# Altium PCB Button Board.PcbDoc
Units mm, origin at the board's own origin, x right, y up, seen from the top; angles counter-clockwise.
Board outline 32.6 x 18 mm, 2 copper layers (Top Layer, Bottom Layer), stack 0.772 mm thick; 10 components, 11 nets, 58 pads, 16 vias.
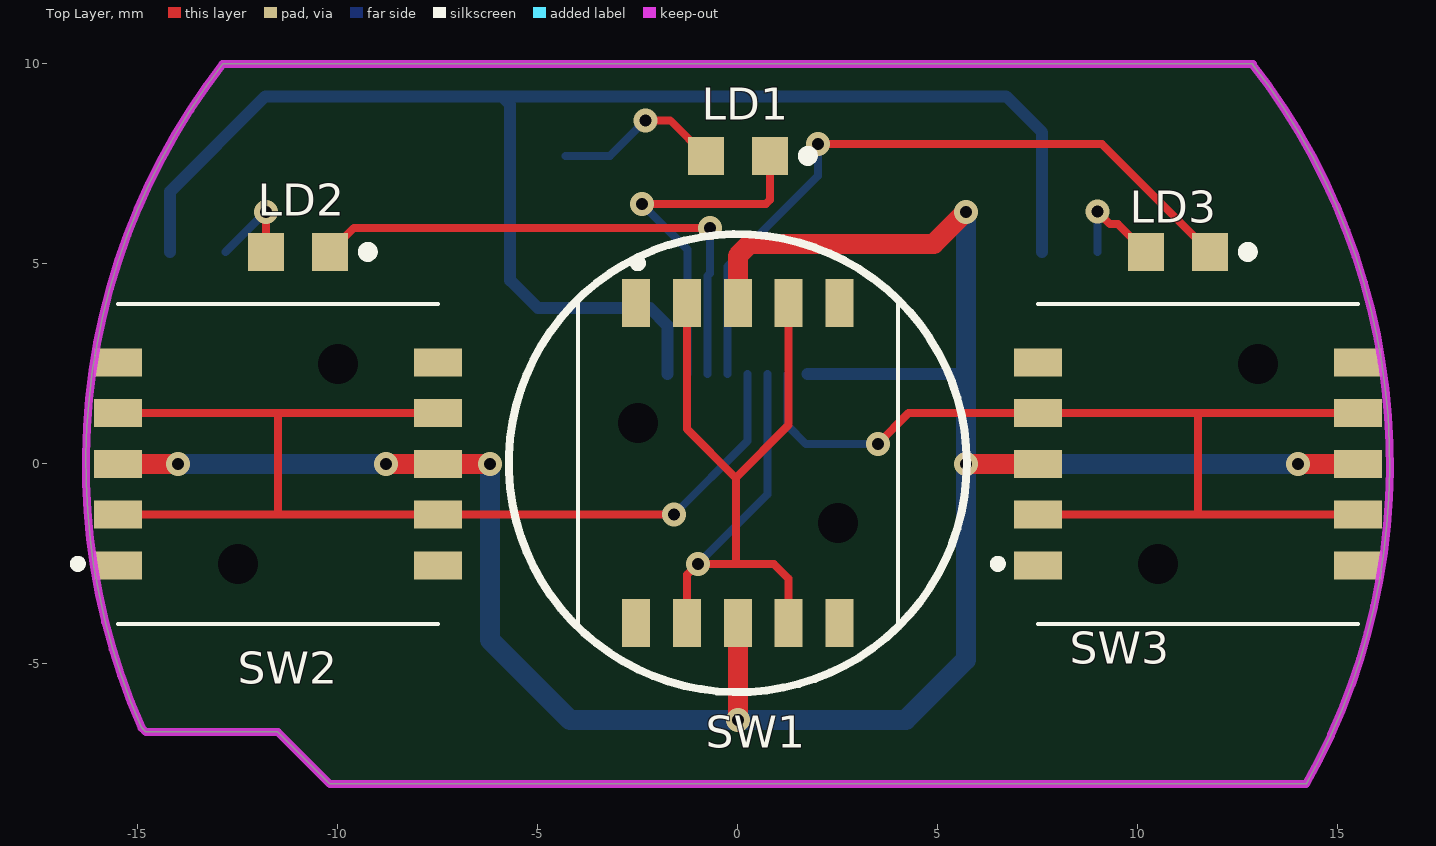
[diagram p0: Top Layer view]
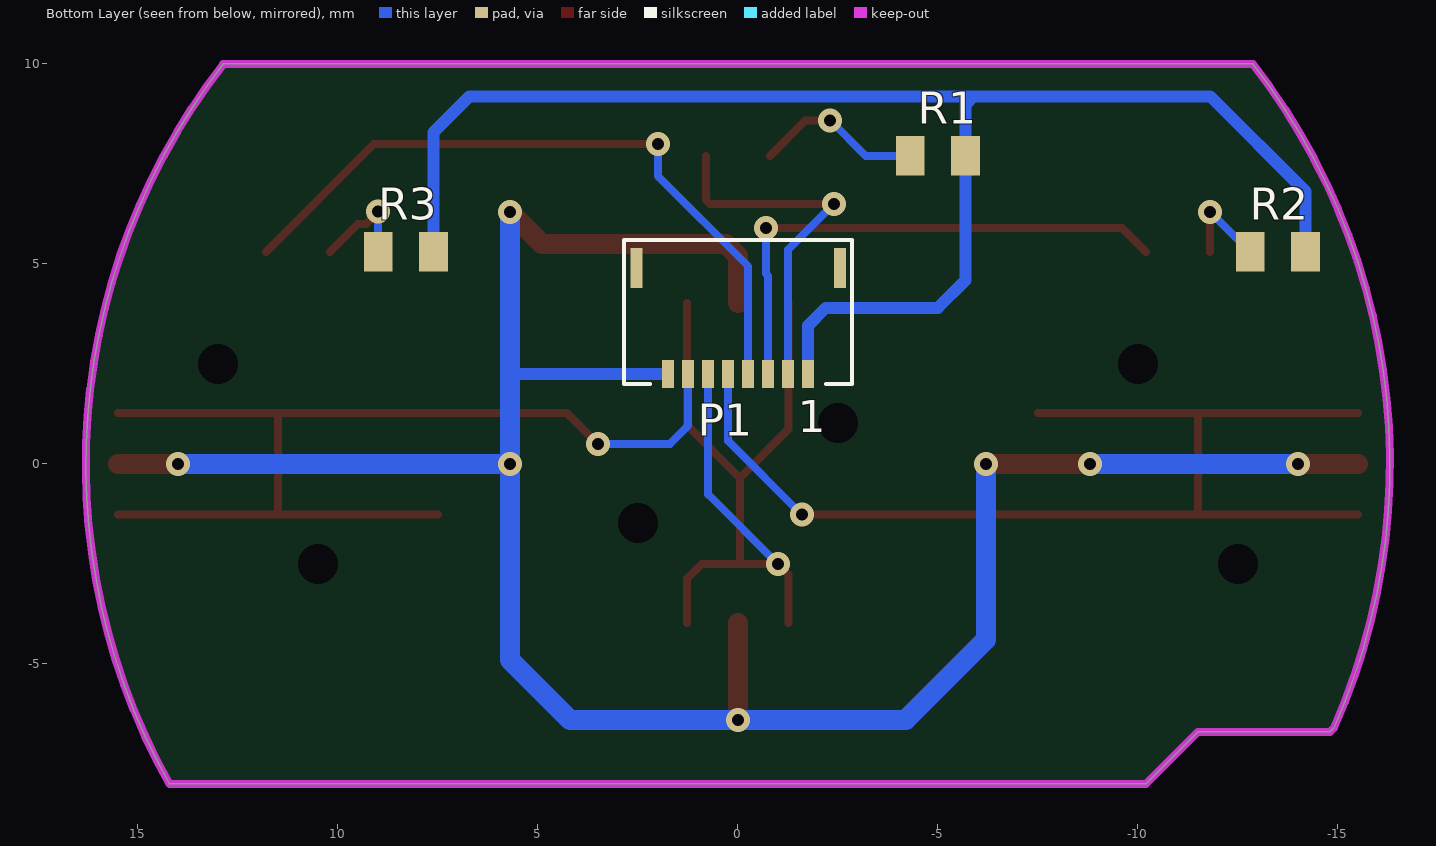
[diagram p1: Bottom Layer view, seen from below]
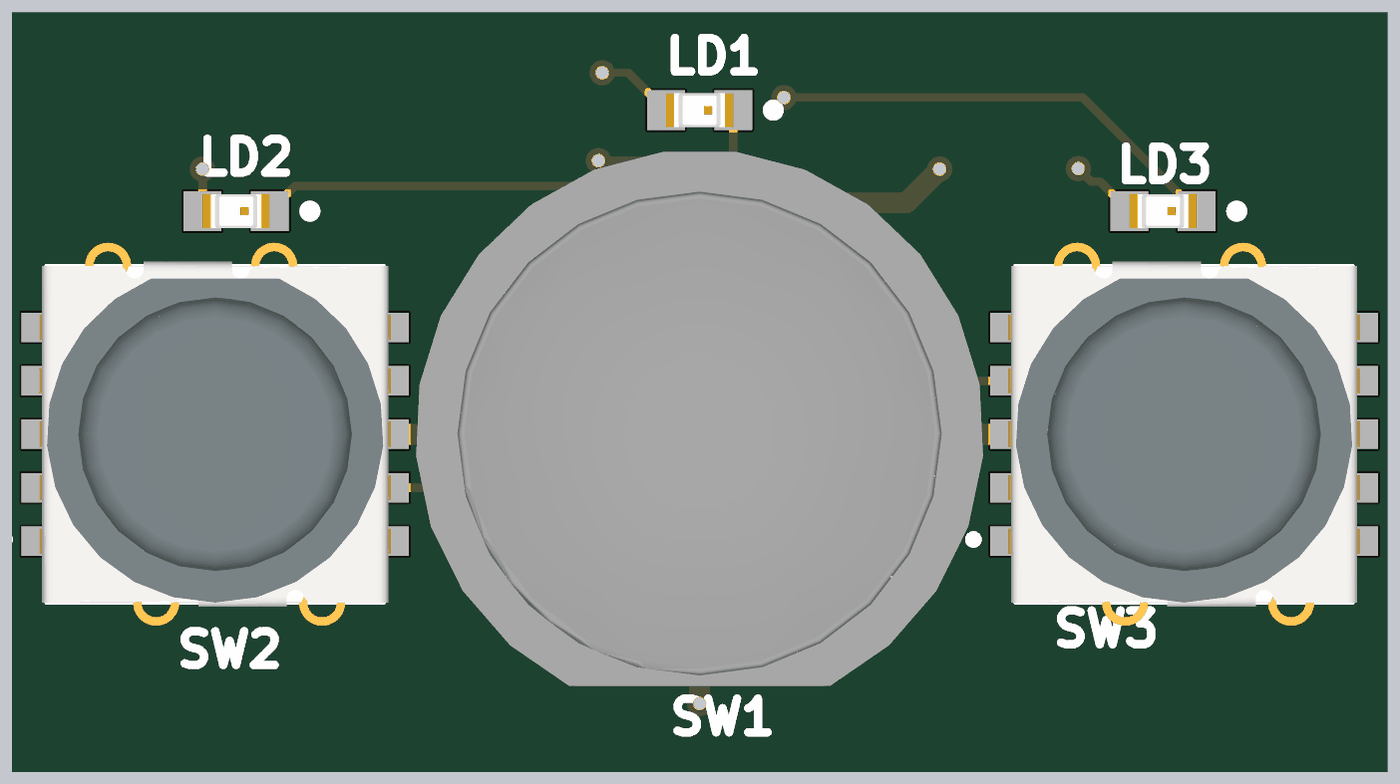
[diagram p2: 3D render of the assembled board from above, using the file's embedded part models]
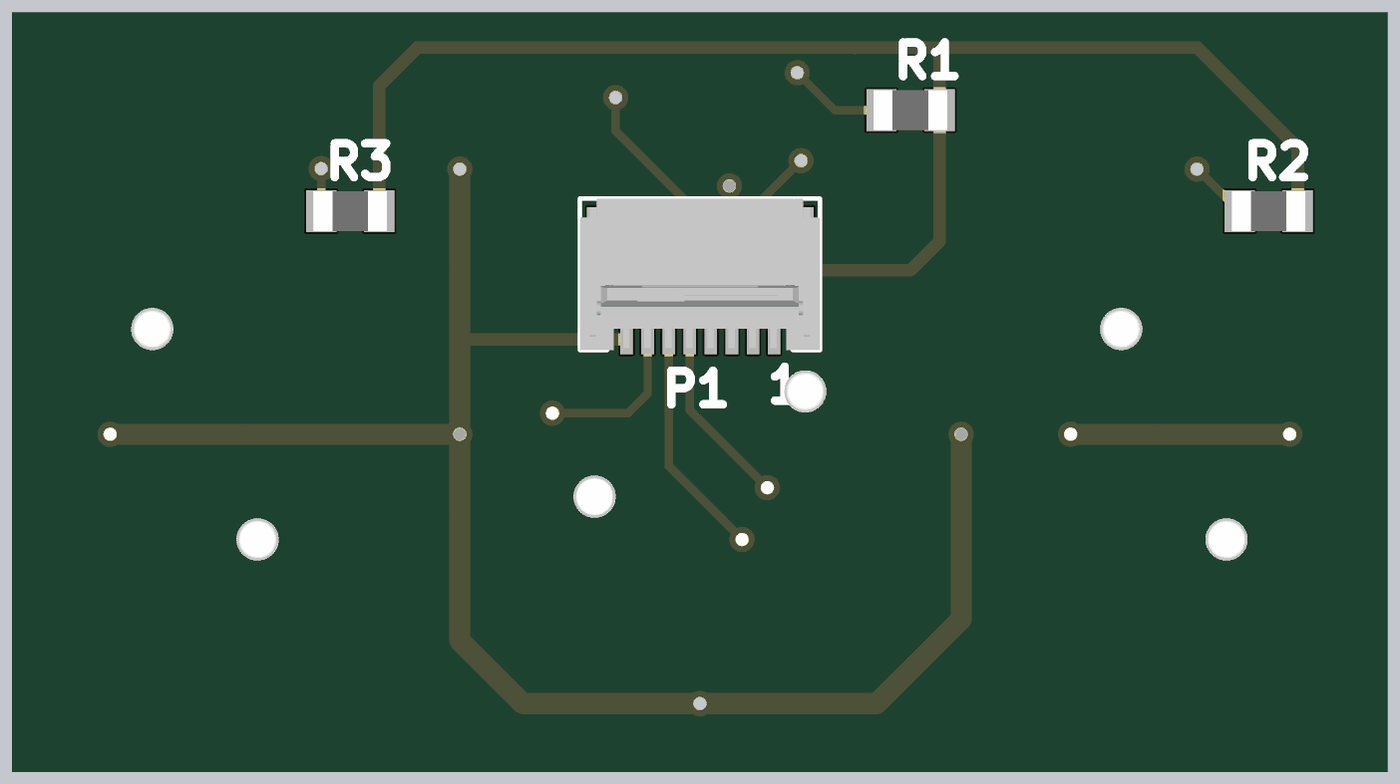
[diagram p3: 3D render of the assembled board from below, using the file's embedded part models]

## Layer stack, top to bottom
Top Solder: solder mask 0.01, Solder Resist, Dk 3.5
Top Layer: signal copper 0.036
Dielectric 1: core 0.7, FR-4, Dk 4.6
Bottom Layer: signal copper 0.036
Bottom Solder: solder mask 0.01, Solder Resist, Dk 3.5

## Board outline
-14.8,-6.7 -11.5,-6.7 -10.2,-8 14.201,-8 14.209,-8.004 ccw(c0,-0.017) 12.876,9.978 12.876,10 -12.883,10 -12.876,9.995 ccw(c0,0) -14.903,-6.601 -14.901,-6.599

## Design rules (kind name [scope] priority, off if disabled: settings)
Clearance Clearance_JP [HasFootprint('SOLDER_JUMPER_NC') vs InNet('GND')] p1: gap=0 ignorepadtopadclearanceinfootprint=FALSE
Clearance Clearance_keep [IsPad or IsRegion vs OnLayer('Keep-Out Layer')] p2: gap=0 ignorepadtopadclearanceinfootprint=FALSE except(0.15: Arc-Poly Track-Poly SMDPad-Poly THPad-Poly Via-Poly Fill-Poly Poly-Poly Poly-Region)
Clearance [All] p3: gap=0.15 ignorepadtopadclearanceinfootprint=FALSE
ComponentClearance [All] p1 off: gap=0.254 collisioncheckmode=3 verticalgap=0.254 showdistances=FALSE
DiffPairsRouting [All] p1: maxlimit=0.15 minlimit=0.15 mostfreqgap=0.15 toplayer_minwidth=0.25 toplayer_maxwidth=0.25 toplayer_prefwidth=0.25 bottomlayer_minwidth=0.25 bottomlayer_maxwidth=0.25 bottomlayer_prefwidth=0.25 maxuncoupledlength=12.7
Height [All] p1 off: minheight=0 maxheight=25.4 prefheight=12.7
HoleSize [All] p1 off: absolutevalues=TRUE maxlimit=5 minlimit=0.1 maxpercent=80.000 minpercent=20.000
HoleToHoleClearance [All] p1: gap=0.2 allowstackedmicrovias=TRUE
MinimumSolderMaskSliver [All] p1 off: minsoldermaskwidth=0.051
PasteMaskExpansion [All] p1 off: expansion=0
PlaneClearance [All] p1: clearance=0.15
PlaneConnect [All] p1: planeconnectstyle=Direct reliefexpansion=0.5 reliefentries=4 reliefconductorwidth=0.5 reliefairgap=0.5
PolygonConnect [All] p1: thpad.connectstyle=Direct thpad.reliefconductorwidth=0.4 thpad.reliefentries=4 thpad.polygonreliefangle="90 Angle" thpad.airgapwidth=0.3 smdpad.connectstyle=Relief smdpad.reliefconductorwidth=0.15 smdpad.reliefentries=4 smdpad.polygonreliefangle="90 Angle" smdpad.airgapwidth=0.2 via.connectstyle=Direct via.reliefconductorwidth=0.4 via.reliefentries=4 via.polygonreliefangle="90 Angle" via.airgapwidth=0.3
RoutingVias [All] p1: holewidth=0.5 width=1 viastyle="Through Hole" minholewidth=0.2 minwidth=0.5 maxholewidth=0.5 maxwidth=1
ShortCircuit ShortCircuit_LEDs [HasFootprint('KPTR-3216QBC-D') vs HasFootprint('KPTR-3216QBC-D')] p1: allowed=TRUE
ShortCircuit ShortCircuit_LEDs_1 [IsTrack vs HasFootprint('KPTR-3216QBC-D')] p2: allowed=TRUE
ShortCircuit [All] p3: allowed=FALSE
SilkToBoardRegionClearance [All] p1 off:
SilkToSilkClearance [All] p1 off: silktosilkclearance=0.254
SilkToSolderMaskClearance SilkToViaClearance [IsVia] p1 off: minsilkscreentomaskgap=0.102 clearancetoexposedcopper=TRUE
SilkToSolderMaskClearance SilkscreenOverComponentPads [IsPad] p2 off: minsilkscreentomaskgap=0.051 clearancetoexposedcopper=TRUE
SolderMaskExpansion [All] p1: expansion=0.05
Width [All] p1: maxlimit=1.2 minlimit=0.15 preferedwidth=0.2
17 further rules are at their usual default settings.

## Components (designator, comment, footprint, x,y, rotation, side; value= is the part's Value field where it differs from the comment)
LD1 "BLUE" LEDC1608X80N_RED 0,7.7 r180 top
LD2 "BLUE" LEDC1608X80N_RED -11,5.3 r180 top
LD3 "BLUE" LEDC1608X80N_RED 11,5.3 r180 top
P1 "503480-0800" 503480-0800 0,3.8 r0 bottom
R1 "330R" RESC1608X50N -5,7.7 r180 bottom value=330
R2 "330R" RESC1608X50N -13.5,5.3 r180 bottom value=330
R3 "330R" RESC1608X50N 8.3,5.3 r180 bottom value=330
SW1 "6CJ1NOPR" Ultranavi_10G 0,0.017 r270 top locked
SW2 "6CJ1NOPR" Ultranavi_10S -11.5,0 r0 top locked
SW3 "6CJ1NOPR" Ultranavi_10S 11.5,0 r0 top locked

## Footprints (in the part's own frame and the unit in brackets; to place one, negate y for a bottom-side part, rotate by r counter-clockwise, add the part's x,y. Pads: shape width x height; smd on the part's side, far side on the other; paste and mask are expansions set on the pad)
503480-0800 [mm]
  rect 0.3x0.7 smd: 1(-1.76,1.55) 2(-1.26,1.55) 3(-0.76,1.55) 4(-0.26,1.55) 5(0.24,1.55) 6(0.74,1.55) 7(1.24,1.55) 8(1.74,1.55)
  rect 0.3x1 smd: 9(-2.55,-1.1) 10(2.53,-1.1)
  silkscreen extent -2.85,-1.8 2.85,1.8, body extent -2.85,-1.8 2.85,1.8, height 1.87
LEDC1608X80N_RED [mm] "Chip RED LED, 2-Leads, Body 1.6x0.8mm, IPC Medium Density"
  rect 0.9x0.95 smd: 1(0.8,0) 2(-0.8,0)
  silkscreen extent -1.88,-0.12 -1.63,0.12, body extent -0.8,-0.4 0.8,0.4, height 0.8
RESC1608X50N [mm] "Chip Resistor, EIA 0603, Metric 1608, Body 1.6x0.8mm, IPC Medium Density"
  rect 0.72x0.99 smd: 1(-0.69,0) 2(0.69,0)
  body extent -0.87,-0.48 0.88,0.47, height 0.5
Ultranavi_10G [mm]
  rect 1.2x0.7 smd: 0(-4,2.54) 0(-4,-2.54) 0(4,2.54) 0(4,-2.54) 1(-4,0) 1(4,0) 2(-4,-1.27) 2(-4,1.27) 2(4,-1.27) 2(4,1.27)
  round 0.5 hole 1 unplated: 0(-1,-2.5) 0(1.5,2.5)
  silkscreen extent -5.1,-4 4,4, body extent -6.75,-6.75 6,6.75, height 4.92
Ultranavi_10S [mm]
  rect 1.2x0.7 smd: 0(-4,-2.54) 0(-4,2.54) 0(4,-2.54) 0(4,2.54) 1(-4,0) 1(4,0) 2(-4,-1.27) 2(-4,1.27) 2(4,-1.27) 2(4,1.27)
  round 0.5 hole 1 unplated: 0(-1,-2.5) 0(1.5,2.5)
  silkscreen extent -5.1,-4 4,4, body extent -4.17,-4.55 4.17,4.55, height 7.49

## Part data
LD1 LD2 LD3: library part LED_GREEN_0603_THG1111C-0005-TR, "LED", 2. VALUE="LED GREEN 100mcd", 6. MANUF INST=ALTERNATIVE, 7. PACKAGE=0603, 3. MAN BRAND=Stanley, 4. MAN P/N=THG1111C-0005-TR, 5. DATASHEET LINK=https://www.mouser.com/datasheet/2/917/stanley_led_2018_02-1504930.pdf, 8. PINS=2, 9. TYPE=SMD
P1: library part "Header 8", "Header, 8-Pin", LatestRevisionDate=17-Jul-2002, LatestRevisionNote="Re-released for DXP Platform.", Publisher="Altium Limited"
R1 R2 R3: library part Resistor
SW1 SW2 SW3: library part SW-SPST, "2.5mm 1.6mm Round Button 50mA Brick nogging 3mm SPST 12V SMD,2.5x3mm  Tactile Switches ROHS"

## Via types
v1: diameter 0.6, hole 0.3, Top Layer to Bottom Layer, tented both sides, 16 vias

## Nets (pads, with @x,y where several pads share a name; then routed paths per layer and width w, separated by ;. In a path a pad name is that pad's centre, name@x,y a point inside that pad or via, vN(x,y) a via of type N, cw(c..) or ccw(c..) an arc to the next point about the centre after c; other vN are vias at no path point)
Button_1: P1.5 SW2.2 | length 28.7
  Top Layer w0.2: SW2.2@-15.5,-1.27 -11.5,-1.27 ; SW2.2@-15.5,1.27 -11.5,1.27 ; SW2.2@-7.5,1.27 -11.5,1.27 ; v1(-1.6,-1.27) -7.5,-1.27 -11.5,-1.27 ; -11.5,-1.27 -11.5,1.27
  Bottom Layer w0.2: v1(-1.6,-1.27) 0.24,0.57 P1.5
Button_2: P1.6 SW1.2 | length 22.5
  Top Layer w0.2: SW1.2@-1.27,-3.983 -1.27,-2.77 v1(-1,-2.5) -0.05,-2.5 ; SW1.2@-1.27,4.017 -1.27,0.87 -0.05,-0.35 ; SW1.2@1.27,-3.983 1.27,-2.87 0.9,-2.5 -0.05,-2.5 ; SW1.2@1.27,4.017 1.27,0.97 -0.05,-0.35 ; -0.05,-2.5 -0.05,-0.35
  Bottom Layer w0.2: v1(-1,-2.5) 0.74,-0.76 P1.6
Button_3: P1.7 SW3.2 | length 26.6
  Top Layer w0.2: v1(3.5,0.5) 4.27,1.27 7.5,1.27 11.5,1.27 ; SW3.2@7.5,-1.27 11.5,-1.27 ; SW3.2@15.5,-1.27 11.5,-1.27 ; SW3.2@15.5,1.27 11.5,1.27 ; 11.5,-1.27 11.5,1.27
  Bottom Layer w0.2: P1.7 1.24,0.96 1.7,0.5 v1(3.5,0.5)
GND: P1.8 SW1.1 SW2.1 SW3.1 | length 63.6
  Top Layer w0.5: SW2.1@-15.5,0 v1(-14,0) ; v1(-8.8,0) -7.5,0 v1(-6.2,0) ; v1(0,-6.4) SW1.1@0,-3.983 ; SW1.1@0,4.017 0,5.2 0.3,5.5 4.9,5.5 v1(5.7,6.3) ; v1(5.7,0) SW3.1@7.5,0 ; v1(14,0) SW3.1@15.5,0
  Bottom Layer w0.3: P1.8 5.65,2.25 5.7,2.2
  Bottom Layer w0.5: v1(-14,0) v1(-8.8,0) ; v1(-6.2,0) -6.2,-4.4 -4.2,-6.4 4.2,-6.4 5.7,-4.9 v1(5.7,0) ; v1(5.7,6.3) 5.7,2.2 v1(5.7,0) ; v1(14,0) v1(5.7,0)
LED_1: LD1.2 P1.2 | length 9.1
  Top Layer w0.2: v1(-2.4,6.5) 0.7,6.5 0.8,6.6 LD1.2
  Bottom Layer w0.2: v1(-2.4,6.5) -1.26,5.36 P1.2
LED_2: LD2.2 P1.3 | length 13.4
  Top Layer w0.2: LD2.2 -9.6,5.9 v1(-0.7,5.9)
  Bottom Layer w0.2: P1.3 -0.76,4.7 -0.7,4.76 v1(-0.7,5.9)
LED_3: LD3.2 P1.4 | length 17.6
  Top Layer w0.2: v1(2,8) 9.1,8 LD3.2
  Bottom Layer w0.2: P1.4 -0.26,4.94 2,7.2 v1(2,8)
NetLD1_1: LD1.1 R1.1 | length 4.2
  Top Layer w0.2: v1(-2.31,8.59) -1.69,8.59 LD1.1
  Bottom Layer w0.2: R1.1 -3.2,7.7 v1(-2.31,8.59)
NetLD2_1: LD2.1 R2.1 | length 2.4
  Top Layer w0.2: LD2.1 v1(-11.8,6.3)
  Bottom Layer w0.2: R2.1 -11.81,6.3 v1(-11.8,6.3)
NetLD3_1: LD3.1 R3.1 | length 2.6
  Top Layer w0.2: v1(8.99,6.31) 9.3,6 9.5,6 LD3.1
  Bottom Layer w0.2: R3.1 v1(8.99,6.31)
VDD33: P1.1 R1.2 R2.2 R3.2 | length 38
  Bottom Layer w0.3: R2.2 -14.19,6.81 -11.81,9.19 -5.9,9.19 ; -3.69,9.18 -3.7,9.19 ; P1.1 -1.76,3.46 -2.2,3.9 -5,3.9 -5.69,4.59 R1.2 -5.69,8.98 -5.9,9.19 ; R3.2 7.61,8.29 6.71,9.19 -3.7,9.19 ; -5.9,9.19 -3.7,9.19
pads on no net: P1.9 P1.10 SW1.0 SW2.0 SW3.0

## Keep-outs
Keep-Out Layer:
  the board outline again, w0.2

## Silkscreen, mask and mechanical layers (free items; w line width, h text height)
Top Overlay:
  circle w0.2: c0,0.017 r5.725
Bottom Overlay:
  text "1" at -1.5,0.791 h0.8
Dimension:
  lines w0.05: -14.903,-6.601 cw(c0,0) -12.876,9.995 ; -14.901,-6.599 -14.8,-6.7 -11.5,-6.7 -10.2,-8 14.201,-8 ; -12.883,10 12.876,10 ; 12.876,9.978 cw(c0,-0.017) 14.209,-8.004